# EAGLE board Gamebadge3_revC (EAGLE 8.7.1)
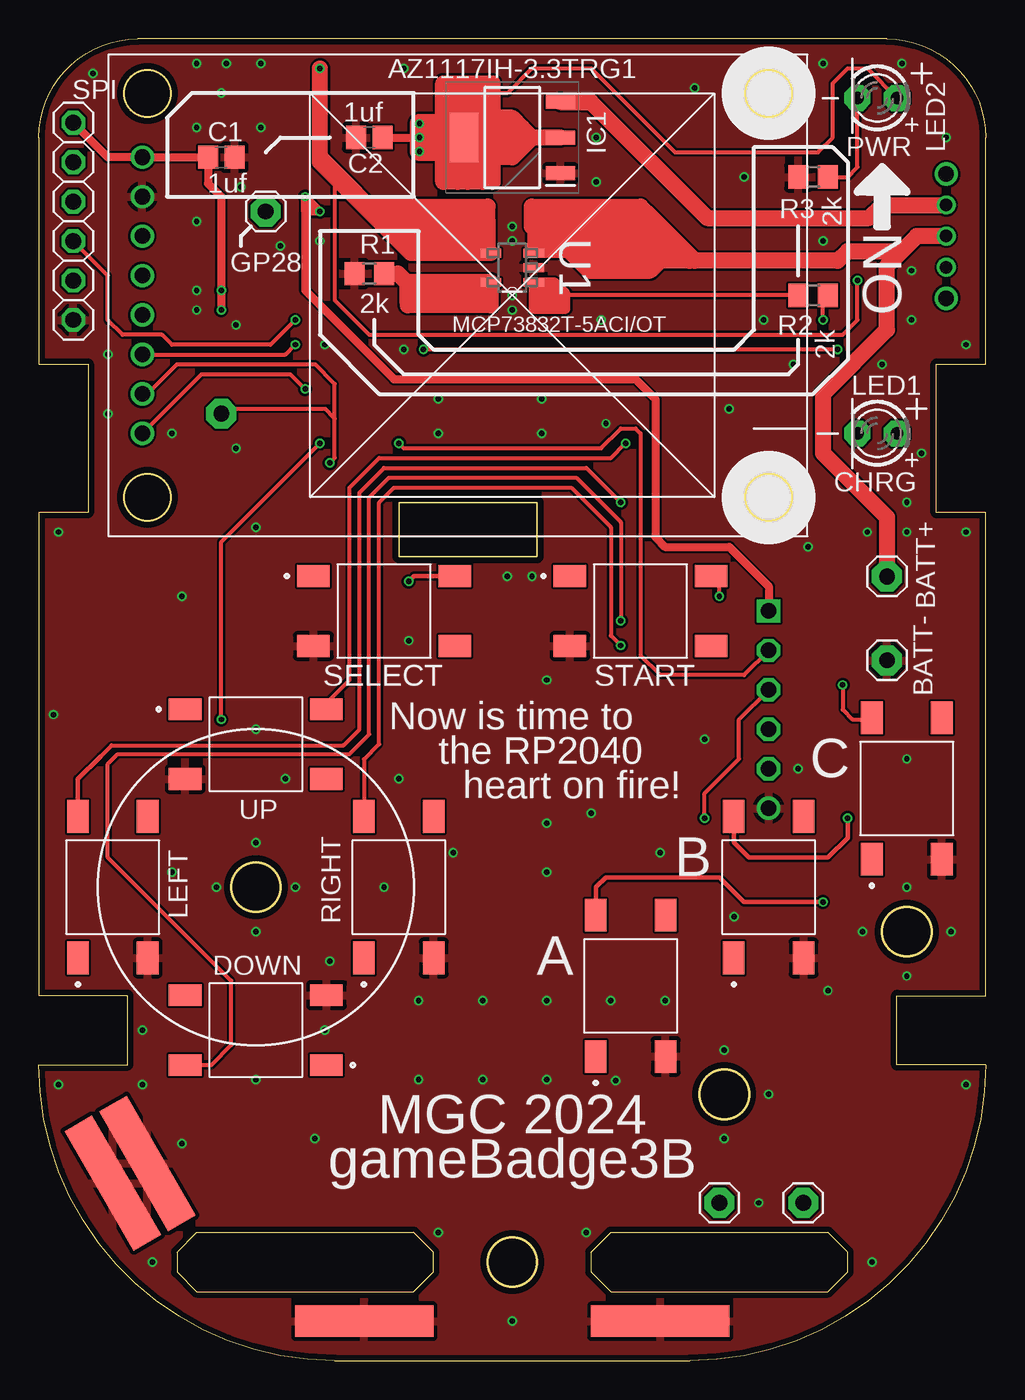
[diagram p0: board, top side]
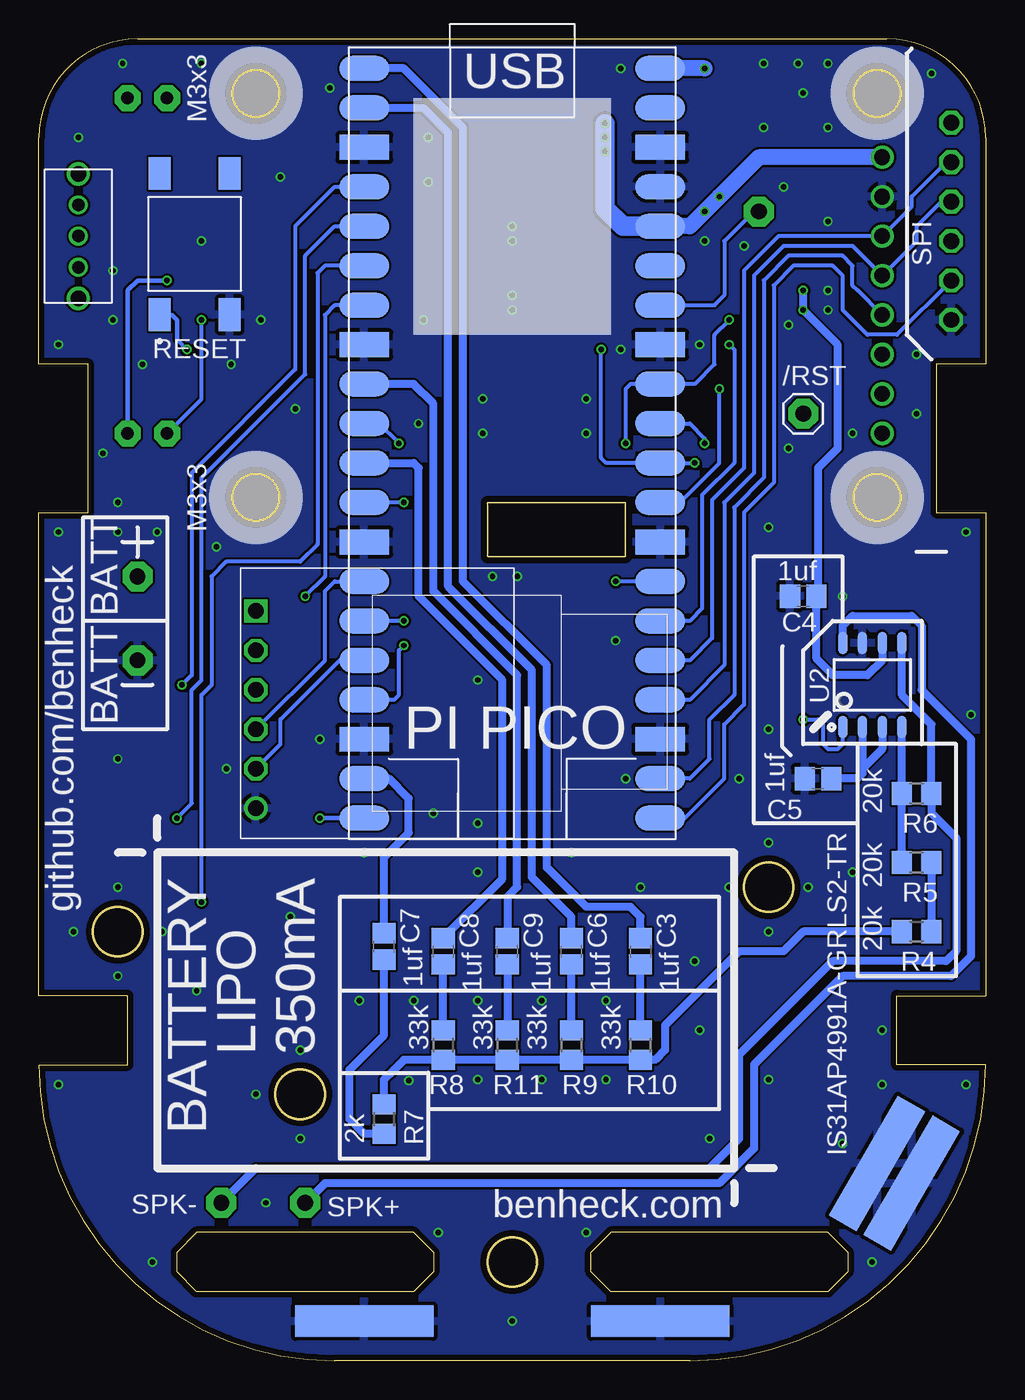
[diagram p1: board, bottom side, seen from below]

Size 60.96 x 85.09 mm. Coordinates in mm from the lower left corner, seen from the top.
Outline: 60.96,23.5 60.96,54.61 57.78,54.61 57.78,64.14 60.96,64.14 60.96,78.74 arc90 54.61,85.09 6.35,85.09 arc90 0,78.74 0,64.14 3.18,64.14 3.18,54.61 0,54.61 0,23.5 5.71,23.5 5.71,19.05 0,19.05 arc90 19.05,0 41.91,0 arc90 60.96,19.05 55.25,19.05 55.25,23.5 60.96,23.5
Outline: 36.83,8.26 50.8,8.26 52.07,6.98 52.07,5.72 50.8,4.45 36.83,4.45 35.56,5.72 35.56,6.98 36.83,8.26
Outline: 10.16,8.26 24.13,8.26 25.4,6.98 25.4,5.72 24.13,4.45 10.16,4.45 8.89,5.72 8.89,6.98 10.16,8.26
Outline: 32.07,51.75 32.07,55.25 23.18,55.25 23.18,51.75 32.07,51.75
Outline: circle at 13.97,30.48 radius 1.59
Outline: circle at 30.48,6.35 radius 1.59
Outline: circle at 55.88,27.62 radius 1.59
Outline: circle at 44.13,17.15 radius 1.59
Copper layers (1*16): Top 0.035559375mm / dielectric 1.6mm / Bottom 0.035559375mm
Design rules "oshpark-2layer": minimum track width 6mil, minimum drill 10mil, track to track 6mil, track to pad 6mil, pad to pad 6mil, via to via 6mil, smd to smd 6mil, copper to edge 15mil, drill to drill 6mil, minimum pad ring 5mil, minimum via ring 5mil, stop-mask expansion 2.5mil, vias tented up to drill 0mil, thermal gap 10mil

## Footprints (pad centres in the part's own frame; a part is rotated, then mirrored left to right if it is on the bottom)
1X01 = drill 1.016 pad 1.93 octagon: 1 0,0
SW_TS04-66-50-BK-100-SMT = smd 2.1 x 1.4: 1 -4.55,2.25; 2 -4.55,-2.25; 3 4.55,2.25; 4 4.55,-2.25
C0805 = smd 1.3 x 1.5: 1 -0.85,0; 2 0.85,0
SOT230P700X170-4N = smd 1.85 x 0.9: 1 -3.1,2.3; 2 -3.1,0; 3 -3.1,-2.3 | smd 1.85 x 3.2: 4 3.1,0
LED3MM = drill 0.813 pad 1.676 octagon: A -1.27,0; K 1.27,0
R0805 = smd 1.3 x 1.5: 1 -0.95,0; 2 0.95,0
1X06 = drill 1.016 octagon: 1 -6.35,0; 2 -3.81,0; 3 -1.27,0; 4 1.27,0; 5 3.81,0; 6 6.35,0
SOT95P300X145-5N = smd 1.321 x 0.559: 1 -1.372,0.94; 2 -1.372,0; 3 -1.372,-0.94; 4 1.372,-0.94; 5 1.372,0.94
SOIC127P604X170-8N = smd 1.45 x 0.6: 1 -2.7,1.905; 2 -2.7,0.635; 3 -2.7,-0.635; 4 -2.7,-1.905; 5 2.7,-1.905; 6 2.7,-0.635; 7 2.7,0.635; 8 2.7,1.905
SD_CARD = drill 1 square: P$1 -6.35,0 | drill 1 octagon: P$2 -3.81,0; P$3 -1.27,0; P$4 1.27,0; P$5 3.81,0 | drill 1: P$6 6.35,0
GND_CLIP = smd 8.89 x 2.032: P$1 0,0 | smd 8.89 x 2.032 bottom: P$2 0,0
1825232-1 = drill 0.8: 1 -2,0; 2 0,0; 3 2,0 | drill 1: GND -4,0; GND1 4,0
ST7789_WAVE = drill 1: P$1 -23.82,8.89; P$2 -23.82,6.35; P$3 -23.82,3.81; P$4 -23.82,1.27; P$5 -23.82,-1.27; P$6 -23.82,-3.81; P$7 -23.82,-6.35; P$8 -23.82,-8.89
RPI_PICO_W = smd 3.2 x 1.6: 3V3 9.525,13.97; 3V3_EN 9.525,16.51; ADC_VREF 9.525,11.43; AGND 9.525,6.35; GND@1 -9.525,19.05; GND@2 -9.525,6.35; GND@3 -9.525,-6.35; GND@4 -9.525,-19.05; GND@6 9.525,-19.05; GND@7 9.525,-6.35; GND@8 9.525,19.05; GP0 -9.525,24.13; GP1 -9.525,21.59; GP2 -9.525,16.51; GP3 -9.525,13.97; GP4 -9.525,11.43; GP5 -9.525,8.89; GP6 -9.525,3.81; GP7 -9.525,1.27; GP8 -9.525,-1.27; GP9 -9.525,-3.81; GP10 -9.525,-8.89; GP11 -9.525,-11.43; GP12 -9.525,-13.97; GP13 -9.525,-16.51; GP14 -9.525,-21.59; GP15 -9.525,-24.13; GP16 9.525,-24.13; GP17 9.525,-21.59; GP18 9.525,-16.51; GP19 9.525,-13.97; GP20 9.525,-11.43; GP21 9.525,-8.89; GP22 9.525,-3.81; GP26_A0 9.525,1.27; GP27_A1 9.525,3.81; GP28_A2 9.525,8.89; RUN 9.525,-1.27; VBUS 9.525,24.13; VSYS 9.525,21.59

## Placement (x,y rotation side)
/RST  [1X01]  11.75,60.96 0 bottom
A  TS04-66-50-BK-100-SMT  [SW_TS04-66-50-BK-100-SMT]  38.1,24.13 90 top
B  TS04-66-50-BK-100-SMT  [SW_TS04-66-50-BK-100-SMT]  46.99,30.48 90 top
BATT+  [1X01]  54.61,50.48 180 top
BATT-  [1X01]  54.61,45.09 0 top
C  TS04-66-50-BK-100-SMT  [SW_TS04-66-50-BK-100-SMT]  55.88,36.83 90 top
C1  1uf  [C0805]  11.75,77.47 0 top
C2  1uf  [C0805]  21.27,78.74 180 top
C3  1uf  [C0805]  22.23,26.35 270 bottom
C4  1uf  [C0805]  11.75,49.21 180 bottom
C5  1uf  [C0805]  10.8,37.47 180 bottom
C6  1uf  [C0805]  26.67,26.35 270 bottom
C7  1uf  [C0805]  38.73,26.67 270 bottom
C8  1uf  [C0805]  34.92,26.35 270 bottom
C9  1uf  [C0805]  30.8,26.35 270 bottom
DOWN  TS04-66-50-BK-100-SMT  [SW_TS04-66-50-BK-100-SMT]  13.97,21.27 180 top
GP28  [1X01]  14.61,73.98 0 top
IC1  AZ1117IH-3.3TRG1  [SOT230P700X170-4N]  30.48,78.74 180 top
LED1  CHRG  [LED3MM]  53.98,59.69 180 top
LED2  PWR  [LED3MM]  53.98,81.28 180 top
LEFT  TS04-66-50-BK-100-SMT  [SW_TS04-66-50-BK-100-SMT]  4.76,30.48 90 top
R1  2k  [R0805]  21.27,69.98 0 top
R2  2k  [R0805]  49.85,68.58 180 top
R3  2k  [R0805]  49.85,76.2 180 top
R4  20k  [R0805]  4.45,27.62 180 bottom
R5  20k  [R0805]  4.45,32.07 0 bottom
R6  20k  [R0805]  4.45,36.51 0 bottom
R7  2k  [R0805]  38.73,15.56 270 bottom
R8  33k  [R0805]  34.92,20.32 90 bottom
R9  33k  [R0805]  26.67,20.32 90 bottom
R10  33k  [R0805]  22.23,20.32 90 bottom
R11  33k  [R0805]  30.8,20.32 90 bottom
RESET  TS04-66-50-BK-100-SMT  [SW_TS04-66-50-BK-100-SMT]  50.93,71.88 90 bottom
RIGHT  TS04-66-50-BK-100-SMT  [SW_TS04-66-50-BK-100-SMT]  23.18,30.48 90 top
SELECT  TS04-66-50-BK-100-SMT  [SW_TS04-66-50-BK-100-SMT]  22.23,48.26 0 top
SPI  [1X06]  2.22,73.34 270 top
SPK+  [1X01]  43.81,10.16 0 top
SPK-  [1X01]  49.21,10.16 0 top
START  TS04-66-50-BK-100-SMT  [SW_TS04-66-50-BK-100-SMT]  38.73,48.26 0 top
U1  MCP73832T-5ACI/OT  [SOT95P300X145-5N]  30.48,70.36 180 top
U2  IS31AP4991A-GRLS2-TR  [SOIC127P604X170-8N]  7.3,43.5 90 bottom
U$1  SD_CARD_ADAPTER  [SD_CARD]  46.99,41.91 270 bottom
U$2  GND_CLIP  [GND_CLIP]  20.95,2.54 0 top
U$3  GND_CLIP  [GND_CLIP]  40.01,2.54 0 top
U$4  GND_CLIP  [GND_CLIP]  6.98,12.7 300 top
U$5  GND_CLIP  [GND_CLIP]  4.76,11.43 300 top
U$6  1825232-1  [1825232-1]  58.42,72.39 90 bottom
U$7  ST7789_CS  [ST7789_WAVE]  30.48,68.58 0 top
U$8  [RPI_PICO_W]  30.48,59.05 0 bottom
UP  TS04-66-50-BK-100-SMT  [SW_TS04-66-50-BK-100-SMT]  13.97,39.69 0 top

## Library data of the parts
/RST BATT+ BATT- C1-C9 GP28 LED1 LED2 SPI SPK+ SPK- = adafruit
A B C DOWN LEFT RESET RIGHT SELECT START UP = TS04-66-50-BK-100-SMT; AVAILABILITY: In Stock; CUI_PURCHASE_URL: https://www.cuidevices.com/product/switches/tactile-switches/ts04-series?utm_source=snapeda.com&utm_medium=referral&utm_campaign=snapedaBOM; DESCRIPTION: 6 x 6 mm, 4.3~9.5 mm Actuator Height, 100~260 gf, Surface Mount, SPST, Tactile Switch; MF: CUI Devices; MP: TS04-66-50-BK-100-SMT; PACKAGE: None; PRICE: None; PURCHASE-URL: https://pricing.snapeda.com/search/part/TS04-66-50-BK-100-SMT/?ref=eda
IC1 = AZ1117IH-3.3TRG1; AVAILABILITY: In Stock; DESCRIPTION: Linear Voltage Regulator IC Positive Fixed 1 Output 1A SOT-223-3; MF: Diodes Inc.; MP: AZ1117IH-3.3TRG1; PACKAGE: SOT-223 Diodes Inc.; PRICE: None; PURCHASE-URL: https://pricing.snapeda.com/search/part/AZ1117IH-3.3TRG1/?ref=eda
R1-R11 = resistor
U1 = MCP73832T-5ACI_OT; AVAILABILITY: In Stock; DESCRIPTION: Charger IC Lithium Ion/Polymer SOT-23-5; MF: Microchip; MP: MCP73832T-5ACI/OT; PACKAGE: SOT-23 Microchip; PRICE: None; PURCHASE-URL: https://pricing.snapeda.com/search/part/MCP73832T-5ACI/OT/?ref=eda
U2 = IS31AP4991A-GRLS2-TR; AVAILABILITY: In Stock; DESCRIPTION: Audio Amp Speaker 1-CH Mono 1.4W Class-AB 8-Pin SOP T/R; MF: Lumissil Microsystems; MP: IS31AP4991A-GRLS2-TR; PACKAGE: None; PRICE: None; PURCHASE-URL: https://pricing.snapeda.com/search/part/IS31AP4991A-GRLS2-TR/?ref=eda
U$1 = SD card adapter
U$2-U$5 U$7 = MGC 2023
U$6 = switch 1825232-1; AVAILABILITY: In Stock; COMMENT: 1825232-1; DESCRIPTION: Switch Slide ON None ON SPDT Side Slide 0.2A 30VDC 10000Cycle PC Pins Bracket Mount/Through Hole; EU_ROHS_COMPLIANCE: Compliant; MF: TE Connectivity; MP: 1825232-1; PACKAGE: None; PRICE: None; PURCHASE-URL: https://pricing.snapeda.com/search/part/1825232-1/?ref=eda
U$8 = RaspberryPi_Pico W

## Nets
3V3: C1.1 C2.1 C4.1 IC1.2 IC1.4 LED2.A SPI.1 U2.6 U$1.P$1 U$7.P$1 U$8.3V3
A: A.3 U$8.GP4
ADC2: GP28.1 U$8.GP28_A2
AMP_EN: U2.1 U$8.GP26_A0
AUDIO: R4.2 R7.1 R8.1 R9.1 R10.1 R11.1
B: B.3 U$8.GP3
C: C.3 U$8.GP2
CHRG: LED1.K R2.1
DOWN: DOWN.3 U$8.GP11
GND: A.2 B.2 BATT-.1 C1.2 C2.2 C4.2 C5.2 C.2 DOWN.2 IC1.1 LEFT.2 R1.1 R3.2 RESET.2 RIGHT.2 SELECT.2 SPI.6 START.2 U1.2 U2.7 U$1.P$6 U$2.P$1 U$2.P$2 U$3.P$1 U$3.P$2 U$4.P$1 U$4.P$2 U$5.P$1 U$5.P$2 U$7.P$2 U$8.3V3_EN U$8.AGND U$8.GND@1 U$8.GND@2 U$8.GND@3 U$8.GND@4 U$8.GND@6 U$8.GND@7 U$8.GND@8 UP.2
GP0: C3.1 U$8.GP0
GP1: C6.1 U$8.GP1
LCD/CS: U$7.P$5 U$8.GP17
LEFT: LEFT.3 U$8.GP9
N$1: C5.1 U2.2 U2.3
N$2: /RST.1 RESET.1 U$7.P$7 U$8.RUN
N$3: U$7.P$6 U$8.GP20
N$4: R4.1 R5.2
N$5: U$7.P$8 U$8.GP22
N$6: R5.1 R6.1 U2.4
N$7: IC1.3 U$6.3
N$8: R6.2 SPK-.1 U2.5
N$9: LED2.K R3.1
N$10: SPK+.1 U2.8
N$12: C7.1 U$8.GP14
N$14: C6.2 R9.2
N$15: C7.2 R7.2
N$16: C8.1 U$8.GP8
N$17: C8.2 R8.2
N$18: C3.2 R10.2
N$20: U$8.ADC_VREF
N$22: C9.1 U$8.GP6
N$23: C9.2 R11.2
PROG: R1.2 U1.5
RIGHT: RIGHT.3 U$8.GP13
SELECT: SELECT.3 U$8.GP21
SPI0_CLK: SPI.3 U$7.P$4 U$8.GP18
SPI0_MISO: SPI.5 U$8.GP16
SPI0_MOSI: SPI.2 U$7.P$3 U$8.GP19
SPI1_CLK: U$1.P$4 U$8.GP10
SPI1_RX: U$1.P$5 U$8.GP12
SPI1_TX: U$1.P$3 U$8.GP15
SPI/CS: SPI.4 U$1.P$2 U$8.GP27_A1
START: START.3 U$8.GP5
STAT: R2.2 U1.1
UP: U$8.GP7 UP.3
VBAT: BATT+.1 U1.3 U$6.2
VDD: LED1.A U1.4 U$8.VBUS

## Tracks (layer width: path | path; a pad name or v marks a point on that pad's centre or on a via)
3V3  (via drill 0.35)
  Top 0.254: LED2.A 53.34,83.19 52.07,83.19 51.12,82.23 51.12,78.74 50.16,77.79 40.96,77.79 35.56,83.19 31.75,83.19 30.16,81.6 28.57,81.6
  Top 0.508: C2.1 v24.51,78.74 | SPI.1 4.45,77.47 U$7.P$1 C1.1 10.9,75.78 11.75,74.93 v11.75,68.9 v11.75,67.63 | 17.62,74.45 v17.14,74.93 17.14,73.98 | 17.62,74.45 v18.1,73.98 17.14,73.98 | U$1.P$1 46.99,49.85 44.45,52.39 40.32,52.39 39.69,53.02 39.69,61.91 38.42,63.18 22.86,63.18 17.14,68.9 17.14,73.98 | 17.14,73.98 17.62,74.45
  Top 1.016: 31.75,78.74 26.04,78.74 | IC1.2 31.75,78.74 | 31.12,79.38 30.48,80.01 27.94,80.01 27.56,79.63 | IC1.4 28.02,79.38 31.12,79.38 | 31.12,79.38 31.75,78.74 | 31.75,78.74 30.48,77.47 27.94,77.47 27.94,78.11 30.48,78.11 | 26.04,78.74 26.04,79.63 26.04,82.23 26.99,82.23 | 26.99,82.23 27.62,82.23 | 27.62,82.23 28.57,82.23 | 28.57,82.23 29.21,82.23 29.21,75.88 28.57,75.88 | 28.57,75.88 27.62,75.88 | 27.62,75.88 26.99,75.88 | 26.99,75.88 26.04,75.88 26.04,78.74 | 26.99,82.23 26.99,75.88 | 27.62,75.88 27.62,82.23 | 28.57,82.23 28.57,81.6 28.57,75.88
  Top 1.27: v24.51,78.74 26.04,78.74 26.8,78.74 | v24.51,78.74 v24.51,79.63 26.04,79.63 27.56,79.63 27.3,79.38 27.3,77.85 v24.51,77.85 v24.51,78.74
  Bottom 0.508: v11.75,68.9 v11.75,67.63 9.53,65.41 9.53,58.74 10.8,57.47 10.8,49.32 C4.1 10.9,45.19 9.84,44.13 7.62,44.13 6.67,45.09 U2.6
  Bottom 1.016: U$7.P$1 14.61,77.47 v17.14,74.93 v18.1,73.98 19.05,73.03 U$8.3V3
  Bottom 1.27: v24.51,79.63 v24.51,78.74 v24.51,77.85 24.51,74.17 23.37,73.03 U$8.3V3
A  (via drill 0.35)
  Top 0.305: A.3 35.88,28.71 35.88,30.48 36.51,31.12 43.81,31.12 45.4,29.53 v50.48,29.53
  Bottom 0.254: U$8.GP4 42.55,70.48 43.02,70.01 43.02,52.55 44.13,51.44 48.89,51.44 49.85,50.48 49.85,43.5 50.48,42.86 v50.48,29.53
ADC2
  Bottom 0.254: U$8.GP28_A2 17.46,67.95 16.83,68.58 16.83,72.07 14.92,73.98 GP28.1
AMP_EN  (via drill 0.35)
  Top 0.254: v11.75,41.28 11.75,52.71 v18.1,59.05
  Bottom 0.254: U$8.GP26_A0 19.05,60.33 18.1,59.37 v18.1,59.05 | v11.75,41.28 10.8,41.28 10.48,40.96 10.48,39.69 10.16,39.37 9.53,39.37 9.21,39.69 U2.1
AUDIO
  Bottom 0.508: R7.1 38.73,18.1 38.1,18.73 37.78,19.05 37.46,19.37 R8.1 R11.1 R9.1 R10.1 21.27,19.37 20.64,20 20.64,21.59 15.88,26.35 13.02,26.35 11.75,27.62 R4.2
B  (via drill 0.35)
  Top 0.305: B.3 44.74,33.37 45.72,32.39 50.8,32.39 52.07,33.66 v52.07,34.93
  Top 0.508: 44.77,34.61 44.77,35 B.3
  Bottom 0.254: U$8.GP3 41.91,73.03 43.81,71.12 43.81,63.5 50.48,56.83 50.48,43.82 51.12,43.18 51.12,35.88 v52.07,34.93
C  (via drill 0.35)
  Top 0.254: v51.75,43.5 51.75,41.91 52.39,41.28 53.53,41.28 C.3
  Top 0.508: 53.66,41.41 C.3
  Bottom 0.254: U$8.GP2 41.91,75.56 44.45,73.03 44.45,63.82 51.12,57.15 51.12,44.13 v51.75,43.5
CHRG  (via drill 0.35)
  Top 0.254: v50.48,66.99 50.48,68.27 R2.1
  Bottom 0.254: LED1.K 50.48,61.91 v50.48,66.99
DOWN  (via drill 0.35)
  Top 0.254: DOWN.3 11.09,19.02 12.38,20.32 12.38,24.45 4.45,32.39 4.45,38.42 5.08,39.05 20,39.05 21.27,40.32 21.27,55.56 22.54,56.83 34.61,56.83 37.47,53.98 v37.47,47.62
  Bottom 0.254: v37.47,47.62 U$8.GP11
GND  (via drill 0.35)
  other vias: 10.16,79.38 30.48,72.07 30.48,73.03 30.48,68.58 30.48,67.63 12.07,83.5 10.16,67.63 10.16,68.9 10.16,73.34 14.29,83.5 14.29,79.38 12.7,66.67 4.45,60.96 8.57,59.69 25.72,61.91 24.45,23.18 28.57,23.18 32.7,23.18 36.83,23.18 24.45,18.1 28.57,18.1 32.7,18.1 37.15,18.03 49.53,52.39 56.83,58.42 53.34,53.34 55.88,55.25 55.88,38.73 48.89,38.1 30.16,50.48 32.38,59.69 25.72,59.69 32.38,61.91 35.88,78.74 56.2,66.99 23.5,83.19 42.23,81.92 50.48,83.5 46.67,66.99 54.29,64.14 8.57,31.43 23.18,37.47 18.73,25.72 13.97,18.1 0.95,41.59 6.67,17.78 6.67,21.27 9.21,13.97 25.72,8.26 35.24,8.26 53.66,6.35 7.3,6.35 1.27,17.78 59.69,17.78 55.88,24.77 30.48,2.54 50.8,23.81 53.02,27.62 35.56,35.24 22.23,30.48 4.45,64.77 3.49,82.87 45.4,76.2 56.2,70.17 23.81,46.36 13.97,40.64 55.56,83.5 55.88,53.34 48.58,64.14 44.13,14.29 46.36,10.16 32.7,31.43 18.41,21.27 13.97,27.62 13.97,33.34 11.43,30.48 16.51,30.48 26.67,32.7 40.01,32.7 40.32,23.18 42.86,40.01 32.7,43.82 31.75,50.48 15.56,71.75 35.88,75.88 36.51,60.33 44.45,61.28 15.88,37.47 50.48,72.07 13.97,53.66 9.21,49.21 1.27,53.34 13.02,75.56 12.7,58.74 11.75,81.6 10.16,83.5 32.7,34.61 44.77,28.58 44.13,20 17.78,14.29 46.99,17.15 55.88,30.48 58.74,27.62 59.69,53.34 59.69,65.41 58.42,78.74 36.2,66.99 18.1,72.07 18.41,65.41 23.5,65.09
  pour Top: -12.7,96.52 78.74,96.52 78.74,-7.62 76.2,-10.16 -7.62,-10.16 -17.78,0 -17.78,91.44
  pour Bottom: -7.62,96.52 68.58,96.52 71.12,93.98 73.66,91.44 73.66,-7.62 68.58,-12.7 -10.16,-12.7 -15.24,-7.62 -15.24,93.98 -12.7,96.52
GP0
  Bottom 0.508: C3.1 22.23,28.58 22.86,29.21 25.72,29.21 28.26,31.75 28.26,44.77 33.66,50.17 33.66,79.38 37.47,83.19 U$8.GP0
GP1
  Bottom 0.508: U$8.GP1 36.2,80.65 34.61,79.06 34.61,49.85 29.21,44.45 29.21,31.12 26.67,28.58 C6.1
LCD/CS
  Bottom 0.254: U$7.P$5 8.25,68.9 8.57,69.22 8.57,70.48 9.21,71.12 12.7,71.12 14.29,69.53 14.29,56.83 16.19,54.93 16.19,42.86 17.78,41.28 17.78,38.73 19.05,37.47 U$8.GP17
LEFT  (via drill 0.35)
  Top 0.254: 3.97,38.89 4.68,39.61 19.61,39.61 20.64,40.64 20.64,55.88 22.23,57.47 35.24,57.47 v37.47,55.25
  Top 0.305: LEFT.3 2.51,37.44 3.97,38.89
  Bottom 0.254: v37.47,55.25 U$8.GP9
N$1
  Bottom 0.508: U2.2 7.94,38.1 | 7.94,38.1 7.94,37.78 8.25,37.47 C5.1 | U2.3 6.67,39.37 7.94,38.1
N$2  (via drill 0.35)
  Top 0.254: U$7.P$7 6.98,62.23 8.89,64.14 17.78,64.14 19.05,62.87 19.05,60.64 | /RST.1 12.07,61.28 18.41,61.28 19.05,60.64 | v18.73,57.79 19.05,58.1 19.05,60.64 | v51.44,65.09 v24.77,65.09
  Bottom 0.254: v18.73,57.79 U$8.RUN 24.45,57.79 24.77,58.1 v24.77,65.09 | 52.07,65.72 v51.44,65.09
  Bottom 0.305: 52.07,65.72 52.07,66.99 52.39,67.31 52.7,67.31
  Bottom 0.508: 52.7,67.31 53.16,67.31 RESET.1
N$3  (via drill 0.35)
  Top 0.254: U$7.P$6 15.88,64.77 v16.51,65.41
  Bottom 0.254: U$8.GP20 19.05,47.62 18.26,48.42 18.26,55.72 16.19,57.79 16.19,65.09 v16.51,65.41
N$4
  Bottom 0.508: R5.2 R4.1
N$5  (via drill 0.35)
  Top 0.254: v17.14,62.55 16.19,63.5 10.47,63.5 U$7.P$8
  Bottom 0.254: v17.14,62.55 17.14,57.79 19.69,55.25 U$8.GP22
N$6
  Bottom 0.508: R5.1 R6.1 U2.4
N$7
  Top 1.016: IC1.3 33.59,81.03 35.56,81.03 43.04,73.55 53.45,73.55 54.29,74.39 U$6.3
N$8
  Bottom 0.508: U2.5 5.4,42.86 3.5,40.96 R6.2 3.5,35.25 1.91,33.66 1.91,26.35 2.54,25.72 9.84,25.72 15.88,19.69 15.88,14.29 17.78,12.38 46.99,12.38 SPK-.1
N$9
  Top 0.254: R3.1 52.07,76.2 52.7,76.84 LED2.K
N$10
  Bottom 0.508: 9.21,46.67 U2.8 9.21,47.31 8.57,47.94 4.76,47.94 4.13,47.31 4.13,43.18 0.95,40.01 0.95,26.04 2.22,24.77 9.21,24.77 14.92,19.05 14.92,13.65 17.14,11.43 42.55,11.43 SPK+.1
N$12
  Bottom 0.508: 39.37,37.47 U$8.GP14 38.42,37.47 37.15,36.2 37.15,33.97 38.73,32.39 C7.1
N$14
  Bottom 0.508: R9.2 C6.2
N$15
  Bottom 0.508: R7.2 40,14.61 40.01,14.61 40.96,15.56 40.96,18.73 38.73,20.96 C7.2
N$16
  Bottom 0.508: U$8.GP8 36.83,57.79 36.51,57.47 36.51,49.21 31.12,43.82 31.12,31.01 C8.1
N$17
  Bottom 0.508: R8.2 C8.2
N$18
  Bottom 0.508: R10.2 C3.2
N$22
  Bottom 0.508: U$8.GP6 36.83,62.87 35.56,61.59 35.56,49.53 30.16,44.13 30.16,30.48 30.8,29.85 C9.1
N$23
  Bottom 0.508: C9.2 R11.2
PROG
  Top 0.254: 28.83,68.45 29.08,68.71
  Top 0.508: 23.11,69.98 23.84,69.25 24.38,68.71
  Top 1.016: 25.09,69.42 U1.5 29.08,69.39 29.08,68.71 | 25.09,69.42 24.38,68.71 | 24.38,68.71 29.08,68.71 | 29.08,68.71 29.08,67.95 23.75,67.95 | 23.75,67.95 25.09,69.29 25.09,69.42 | 24.38,68.71 23.75,68.07 | 23.75,68.07 23.75,67.95 | 25.09,69.42 23.67,69.42 23.11,69.98 R1.2 | 23.75,68.07 23.75,69.15 23.84,69.25
RIGHT  (via drill 0.35)
  Top 0.254: RIGHT.3 20.93,38.71 21.91,39.69 21.91,55.25 22.86,56.2 34.29,56.2 36.83,53.66 36.83,46.67 v37.47,46.04
  Bottom 0.254: U$8.GP13 38.1,42.55 37.78,42.86 37.78,45.72 v37.47,46.04
SELECT  (via drill 0.35)
  Top 0.305: SELECT.3 24.16,50.51 v23.81,50.17
  Bottom 0.254: U$8.GP21 v23.81,50.17
SPI0_CLK
  Bottom 0.254: U$8.GP18 19.05,42.55 16.83,44.77 16.83,55.25 14.92,57.15 14.92,69.85 13.02,71.75 8.57,71.75 U$7.P$4 4.45,72.06 4.45,73.03 2.86,74.61 SPI.3
SPI0_MISO
  Bottom 0.254: U$8.GP16 19.37,34.93 16.83,37.47 16.83,40.96 15.56,42.23 15.56,54.61 13.65,56.52 13.65,69.22 12.38,70.48 9.84,70.48 9.21,69.85 9.21,67.63 7.62,66.04 5.71,66.04 SPI.5
SPI0_MOSI
  Bottom 0.254: U$8.GP19 19.05,45.09 17.62,46.51 17.62,55.4 15.56,57.47 15.56,70.17 13.34,72.39 U$7.P$3 4.76,74.29 4.76,74.93 2.54,77.15 SPI.2
SPI1_CLK
  Bottom 0.254: U$8.GP10 41.91,50.17 42.55,49.53 42.55,45.09 U$1.P$4
SPI1_RX
  Bottom 0.254: U$8.GP12 41.59,45.09 45.4,41.28 45.4,39.69 U$1.P$5
SPI1_TX  (via drill 0.35)
  Top 0.254: U$1.P$3 45.09,41.28 45.09,38.73 42.86,36.51 v42.86,34.93
  Bottom 0.305: v42.86,34.93 U$8.GP15
SPI/CS  (via drill 0.35)
  Top 0.254: v16.51,66.99 14.92,65.41 8.57,65.41 7.94,66.04 5.4,66.04 4.45,66.99 4.45,69.85 SPI.4 | U$1.P$2 45.4,44.13 40.01,44.13 38.73,45.4 38.73,59.69 38.42,60.01 37.47,60.01 36.2,58.74 23.5,58.74 v23.18,59.05
  Bottom 0.254: v16.51,66.99 17.46,66.04 17.46,64.14 18.73,62.87 U$8.GP27_A1 22.86,62.87 23.18,62.55 v23.18,59.05
START  (via drill 0.35)
  Top 0.254: v43.81,49.21 43.81,50.06 43.45,50.43
  Top 0.305: 43.45,50.43 43.28,50.58 START.3
  Bottom 0.254: U$8.GP5 41.91,67.95 42.55,67.31 42.55,50.48 v43.81,49.21
STAT
  Top 0.254: R2.2 33.15,68.58 33.02,68.71
  Top 0.305: 33.34,68.71 33.47,68.58
  Top 0.508: 33.27,69.22 33.02,68.96 | 33.4,68.58 33.02,68.2
  Top 0.61: 31.85,68.96 U1.1 33.2,69.42 33.53,69.09 | 31.85,68.96 31.85,68.58 | 31.85,68.58 31.85,68.2 | 31.85,68.2 31.85,67.72 31.88,67.69 33.91,67.69 33.91,68.2 | 33.91,68.71 33.91,68.2 | 33.53,69.09 33.91,68.71 | 31.85,68.96 33.02,68.96 33.4,68.96 33.53,69.09 | 33.91,68.71 33.34,68.71 33.02,68.71 31.98,68.71 31.85,68.58 | 31.85,68.2 33.02,68.2 33.91,68.2
UP  (via drill 0.35)
  Top 0.254: 18.55,41.91 18.55,42.36 20,43.82 20,56.2 21.91,58.1 36.83,58.1 v37.78,59.05
  Top 0.508: 18.55,41.91 UP.3
  Bottom 0.254: v37.78,59.05 39.05,60.33 U$8.GP7
VBAT
  Top 0.508: 35.18,71.75 34.8,72.14 | 35.88,71.3 35.56,71.62 35.56,71.88 | 35.43,71.75 35.56,71.88 | 35.56,71.88 35.56,71.95
  Top 0.61: 34.86,72.45 34.92,72.39 34.99,72.33 34.8,72.14 31.75,72.14 | 34.86,72.45 34.61,72.71 34.29,73.03 31.75,73.03 31.75,72.52 | 31.75,72.52 31.75,72.14 | 31.75,72.14 31.75,71.75 | 31.75,71.75 31.75,71.4 U1.3 34.29,71.3 35.24,71.3 35.88,71.3 36.5,71.3 | 35.5,71.82 35.43,71.75 | 34.86,72.45 33.78,72.45 31.81,72.45 31.75,72.52 | 31.75,72.14 31.94,71.95 35.56,71.95 36.45,71.95 36.26,71.75 35.18,71.75 31.75,71.75
  Top 1.016: 33.97,72.64 33.78,72.45 | 34.61,72.71 34.92,72.39 36.2,72.39 | U$6.2 56.52,72.39 55.56,71.44 | 31.75,73.03 31.75,73.66 | 31.75,73.66 34.92,73.66 | 55.56,71.44 54.61,70.48 54.61,66.36 50.48,62.23 50.48,58.42 54.61,54.29 BATT+.1 | 34.92,73.66 35.72,72.87 | 35.72,72.87 36.2,72.39 | 36.2,72.39 37.29,71.3 35.88,71.3 36.05,71.12 | 37.78,72.39 36.2,72.39 | 34.92,73.66 36.51,73.66 | 36.51,73.66 37.31,72.87 | 37.31,72.87 37.78,72.39 | 37.78,72.39 39.05,71.12 | 39.05,71.12 36.05,71.12 | 35.72,72.87 36.67,72.87 37.78,71.75 | 39.05,71.12 39.37,70.8 40.01,70.8 | 42.23,70.8 51.44,70.8 52.07,71.44 55.56,71.44 | 42.23,70.8 41.91,70.8 | 41.91,70.8 40.01,70.8 | 34.29,71.3 35.42,70.17 39.37,70.17 40.01,70.8 | 36.05,71.12 35.42,71.12 35.24,71.3 | 36.51,73.66 38.73,73.66 | 41.91,70.8 41.27,71.44 40.96,71.44 38.73,73.66 | 40.01,70.8 40.01,71.44 38.42,73.03 38.26,72.87 37.31,72.87 | 38.73,73.66 39.37,73.66 | 39.37,73.66 42.23,70.8 | 31.75,73.66 31.75,74.3 38.73,74.3 39.37,73.66
VDD  (via drill 0.35)
  Top 0.254: 19.53,76.04 19.05,75.56 19.05,68.26 21.27,66.04 51.75,66.04 52.7,66.99 v52.7,69.53
  Top 1.016: 23.18,72.07 23.95,71.3 U1.4 28.89,71.51 28.89,72.07 | 22.86,72.39 21.91,73.34 | 18.1,77.47 v18.1,83.19 | 21.91,73.34 28.89,73.34 | 28.89,73.34 28.89,72.71 | 28.89,72.71 28.89,72.07 | 28.89,72.71 22.86,72.71 | 22.86,72.71 22.86,72.39 | 22.86,72.39 23.18,72.07 | 23.18,72.07 28.89,72.07 | 28.89,73.34 28.89,74.3 | 22.86,72.71 21.43,74.14 | 21.43,74.14 19.53,76.04 18.1,77.47 | 28.89,74.3 28.73,74.14 21.43,74.14 | 21.91,73.34 18.1,77.15 18.1,77.47 | 21.43,74.14 21.59,74.3 28.89,74.3
  Bottom 0.305: v52.7,69.53 54.61,69.53 55.25,68.9 LED1.A
  Bottom 1.016: v18.1,83.19 U$8.VBUS

## Text on the board
tPlace: ON | Now is time to | the RP2040 | heart on fire! | MGC 2024 | gameBadge3B
bPlace: USB | M3x3 | SPI | M3x3 | BATT | BATT | PI PICO | github.com/benheck | 350mA | LIPO | BATTERY | benheck.com